# Altium PCB nrf24l01_cell(P40).PcbDoc (part 8 of 11)
Units mm, origin at the board's own origin, x right, y up, seen from the top; angles counter-clockwise.
Board outline 136.2 x 112.2 mm, 2 copper layers (TopLayer, BottomLayer); 520 components, 0 nets, 2804 pads, 1040 vias.
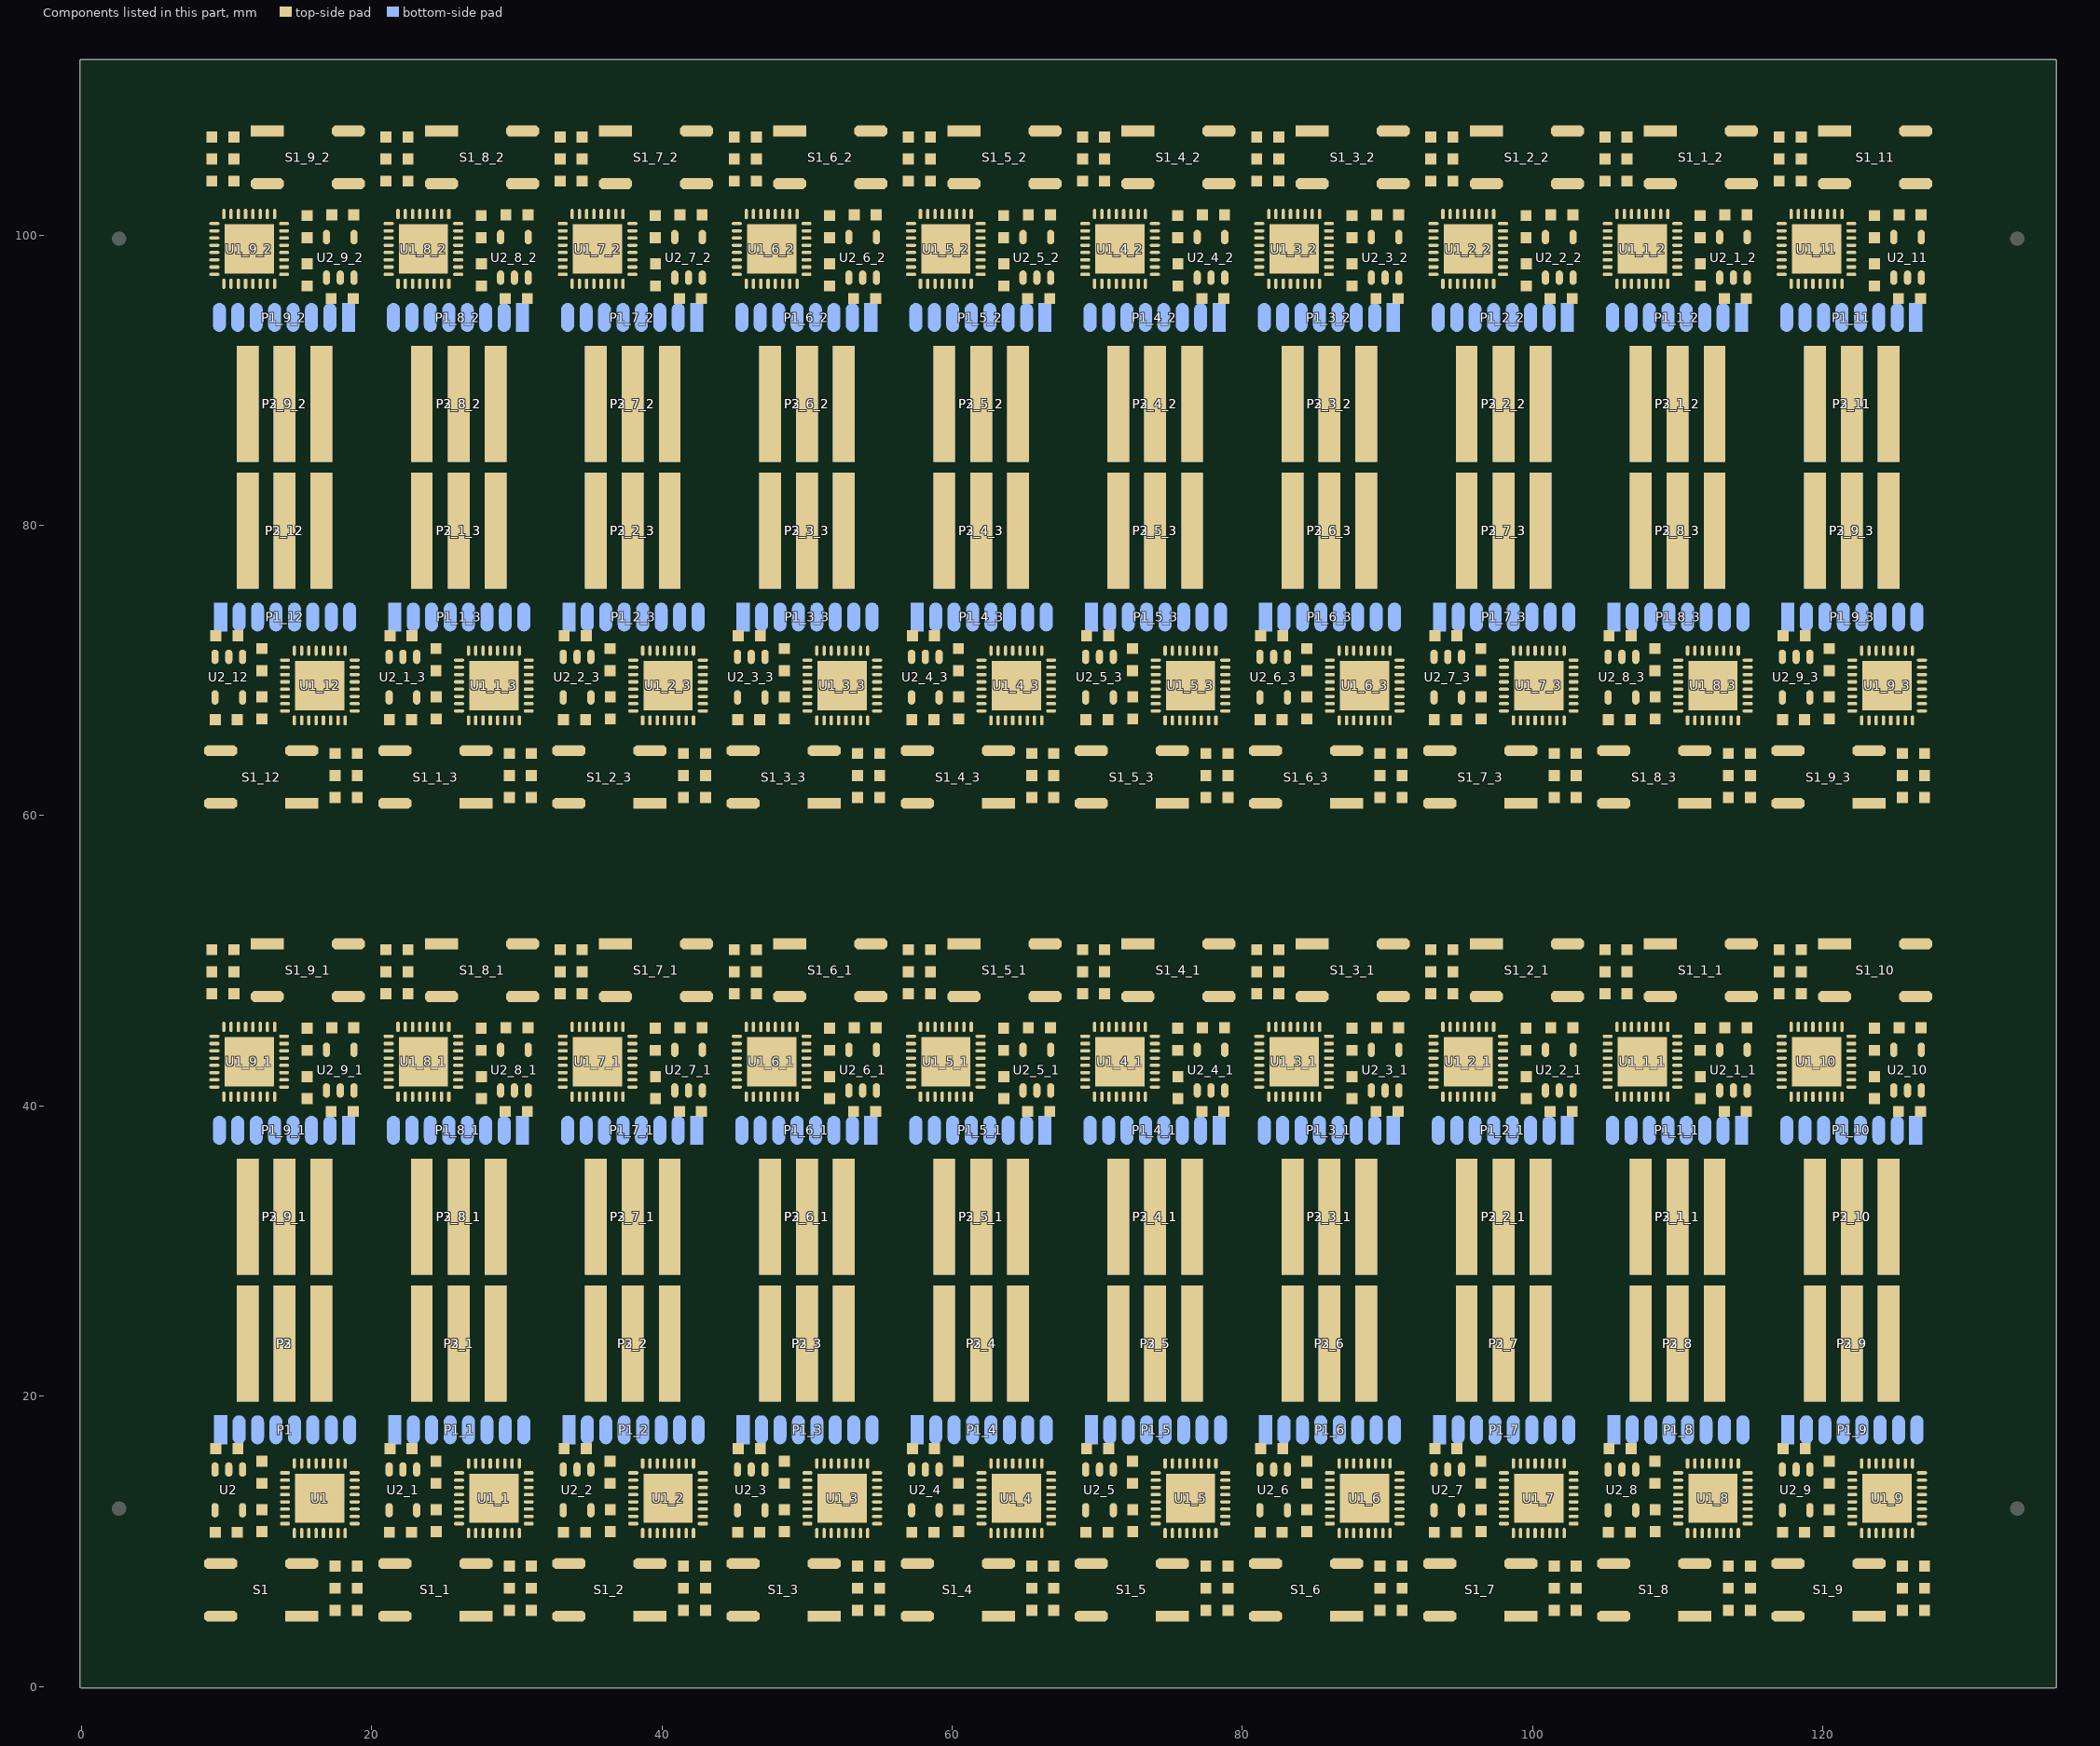
[diagram p8: the components of this part, seen from the top]

## Via types
v1: diameter 0.4, hole 0.2, TopLayer to BottomLayer, tented both sides, 1040 vias

## Nets (pads, with @x,y where several pads share a name; then routed paths per layer and width w, separated by ;. In a path a pad name is that pad's centre, name@x,y a point inside that pad or via, vN(x,y) a via of type N, cw(c..) or ccw(c..) an arc to the next point about the centre after c; other vN are vias at no path point) (continued)
copper on no net: (continued)
  TopLayer w0.254: 109.32,40.64 v1(109.95,40.64) ; 109.32,96.64 v1(109.95,96.64) ; 109.752,50.98 cw(c110.185,50.547) 110.185,51.16 cw(c110.185,51.773) 109.752,51.34 ; 109.752,106.98 cw(c110.185,106.547) 110.185,107.16 cw(c110.185,107.773) 109.752,107.34 ; v1(110.05,15.36) 110.68,15.36 ; v1(110.05,71.36) 110.68,71.36 ; 110.248,4.66 ccw(c109.815,4.227) 109.815,4.84 ccw(c109.815,5.453) 110.248,5.02 ; 110.248,60.66 ccw(c109.815,60.227) 109.815,60.84 ccw(c109.815,61.453) 110.248,61.02 ; 111.16,12.96 112.43,12.96 ; 111.16,68.96 112.43,68.96 ; 111.37,45.524 ccw(c110.937,45.957) 111.55,45.957 ccw(c112.163,45.957) 111.73,45.524 ; 111.37,101.524 ccw(c110.937,101.957) 111.55,101.957 ccw(c112.163,101.957) 111.73,101.524 ; 111.38,41.834 cw(c110.947,41.401) 111.56,41.401 cw(c112.173,41.401) 111.74,41.834 ; 111.38,97.834 cw(c110.947,97.401) 111.56,97.401 cw(c112.173,97.401) 111.74,97.834 ; 111.55,45.344 111.55,46.22 ; 111.55,101.344 111.55,102.22 ; v1(111.56,41.36) 111.56,42.014 112.086,42.54 113.52,42.54 113.98,43 113.98,44.586 114.774,45.38 v1(113.934,46.22) 111.55,46.22 ; 111.56,42.268 ccw(c111.56,42.881) 111.994,42.448 ccw(c112.427,42.014) 111.814,42.014 ; v1(111.56,97.36) 111.56,98.014 112.086,98.54 113.52,98.54 113.98,99 113.98,100.586 114.774,101.38 v1(113.934,102.22) 111.55,102.22 ; 111.56,98.268 ccw(c111.56,98.881) 111.994,98.448 ccw(c112.427,98.014) 111.814,98.014 ; 111.952,4.84 ccw(c112.024,5.565) 112.54,5.05 ; 111.952,60.84 ccw(c112.024,61.565) 112.54,61.05 ; 113.18,10.56 113.18,9.48 113.486,9.174 113.486,8.28 ; 113.18,66.56 113.18,65.48 113.486,65.174 113.486,64.28 ; 113.21,39.62 v1(113.84,40.25) 113.84,41.06 ; 113.21,39.874 ccw(c113.21,40.487) 113.644,40.054 ccw(c114.077,39.62) 113.464,39.62 ; 113.21,95.62 v1(113.84,96.25) 113.84,97.06 ; 113.21,95.874 ccw(c113.21,96.487) 113.644,96.054 ccw(c114.077,95.62) 113.464,95.62 ; 113.306,8.46 ccw(c112.873,8.893) 113.486,8.893 ccw(c114.099,8.893) 113.666,8.46 ; 113.306,64.46 ccw(c112.873,64.893) 113.486,64.893 ccw(c114.099,64.893) 113.666,64.46 ; 113.31,5.06 ccw(c112.877,4.627) 112.877,5.24 ccw(c112.877,5.853) 113.31,5.42 ; 113.31,61.06 ccw(c112.877,60.627) 112.877,61.24 ccw(c112.877,61.853) 113.31,61.42 ; 113.49,5.24 112.73,5.24 112.33,4.84 111.19,4.84 108.93,4.84 108.45,5.32 108.45,9.78 ; 113.49,61.24 112.73,61.24 112.33,60.84 111.19,60.84 108.93,60.84 108.45,61.32 108.45,65.78 ; 113.753,40.723 cw(c113.543,40.513) 113.84,40.513 cw(c114.137,40.513) 113.927,40.723 ; 113.753,96.723 cw(c113.543,96.513) 113.84,96.513 cw(c114.137,96.513) 113.927,96.723 ; 114.774,45.126 ccw(c114.774,44.513) 114.34,44.946 ccw(c113.907,45.38) 114.52,45.38 ccw(c113.907,45.38) 114.34,45.814 ccw(c114.774,46.247) 114.774,45.634 ; 114.774,101.126 ccw(c114.774,100.513) 114.34,100.946 ccw(c113.907,101.38) 114.52,101.38 ccw(c113.907,101.38) 114.34,101.814 ccw(c114.774,102.247) 114.774,101.634 ; 114.834,5.42 ccw(c114.401,5.853) 115.014,5.853 ccw(c115.627,5.853) 115.194,5.42 ; 114.834,6.58 cw(c114.401,6.147) 115.014,6.147 cw(c115.627,6.147) 115.194,6.58 ; 114.834,61.42 ccw(c114.401,61.853) 115.014,61.853 ccw(c115.627,61.853) 115.194,61.42 ; 114.834,62.58 cw(c114.401,62.147) 115.014,62.147 cw(c115.627,62.147) 115.194,62.58 ; 115.014,5.24 115.014,6.76 ; 115.014,61.24 115.014,62.76 ; 116.806,49.42 ccw(c116.373,49.853) 116.986,49.853 ccw(c117.599,49.853) 117.166,49.42 ; 116.806,50.58 cw(c116.373,50.147) 116.986,50.147 cw(c117.599,50.147) 117.166,50.58 ; 116.806,105.42 ccw(c116.373,105.853) 116.986,105.853 ccw(c117.599,105.853) 117.166,105.42 ; 116.806,106.58 cw(c116.373,106.147) 116.986,106.147 cw(c117.599,106.147) 117.166,106.58 ; 116.986,49.24 116.986,50.76 ; 116.986,105.24 116.986,106.76 ; 117.226,10.366 cw(c117.226,9.753) 117.66,10.186 cw(c118.093,10.62) 117.48,10.62 cw(c118.093,10.62) 117.66,11.054 cw(c117.226,11.487) 117.226,10.874 ; 117.226,66.366 cw(c117.226,65.753) 117.66,66.186 cw(c118.093,66.62) 117.48,66.62 cw(c118.093,66.62) 117.66,67.054 cw(c117.226,67.487) 117.226,66.874 ; 118.073,15.277 ccw(c117.863,15.487) 118.16,15.487 ccw(c118.457,15.487) 118.247,15.277 ; 118.073,71.277 ccw(c117.863,71.487) 118.16,71.487 ccw(c118.457,71.487) 118.247,71.277 ; 118.16,14.94 v1(118.16,15.75) 118.79,16.38 ; 118.16,70.94 v1(118.16,71.75) 118.79,72.38 ; 118.334,47.54 cw(c117.901,47.107) 118.514,47.107 cw(c119.127,47.107) 118.694,47.54 ; 118.334,103.54 cw(c117.901,103.107) 118.514,103.107 cw(c119.127,103.107) 118.694,103.54 ; 118.51,50.76 119.27,50.76 119.67,51.16 120.81,51.16 123.07,51.16 123.55,50.68 123.55,46.22 ; 118.51,106.76 119.27,106.76 119.67,107.16 120.81,107.16 123.07,107.16 123.55,106.68 123.55,102.22 ; 118.514,47.72 118.514,46.826 118.82,46.52 118.82,45.44 ; 118.514,103.72 118.514,102.826 118.82,102.52 118.82,101.44 ; 118.536,16.38 cw(c117.923,16.38) 118.356,15.946 cw(c118.79,15.513) 118.79,16.126 ; 118.536,72.38 cw(c117.923,72.38) 118.356,71.946 cw(c118.79,71.513) 118.79,72.126 ; 118.69,50.58 cw(c119.123,50.147) 119.123,50.76 cw(c119.123,51.373) 118.69,50.94 ; 118.69,106.58 cw(c119.123,106.147) 119.123,106.76 cw(c119.123,107.373) 118.69,106.94 ; 119.46,50.95 cw(c119.976,50.435) 120.048,51.16 ; 119.46,106.95 cw(c119.976,106.435) 120.048,107.16 ; 119.57,43.04 120.84,43.04 ; 119.57,99.04 120.84,99.04 ; 120.186,13.986 cw(c119.573,13.986) 120.006,13.552 cw(c120.44,13.119) 120.44,13.732 ; 120.186,69.986 cw(c119.573,69.986) 120.006,69.552 cw(c120.44,69.119) 120.44,69.732 ; 120.26,14.166 ccw(c119.827,14.599) 120.44,14.599 ccw(c121.053,14.599) 120.62,14.166 ; 120.26,70.166 ccw(c119.827,70.599) 120.44,70.599 ccw(c121.053,70.599) 120.62,70.166 ; 120.27,10.476 cw(c119.837,10.043) 120.45,10.043 cw(c121.063,10.043) 120.63,10.476 ; 120.27,66.476 cw(c119.837,66.043) 120.45,66.043 cw(c121.063,66.043) 120.63,66.476 ; v1(120.44,14.64) 120.44,13.986 119.914,13.46 118.48,13.46 118.02,13 118.02,11.414 117.226,10.62 v1(118.066,9.78) 120.45,9.78 ; v1(120.44,70.64) 120.44,69.986 119.914,69.46 118.48,69.46 118.02,69 118.02,67.414 117.226,66.62 v1(118.066,65.78) 120.45,65.78 ; 120.45,10.656 120.45,9.78 ; 120.45,66.656 120.45,65.78 ; 121.32,40.64 v1(121.95,40.64) ; 121.32,96.64 v1(121.95,96.64) ; 121.752,50.98 cw(c122.185,50.547) 122.185,51.16 cw(c122.185,51.773) 121.752,51.34 ; 121.752,106.98 cw(c122.185,106.547) 122.185,107.16 cw(c122.185,107.773) 121.752,107.34 ; v1(122.05,15.36) 122.68,15.36 ; v1(122.05,71.36) 122.68,71.36 ; 122.248,4.66 ccw(c121.815,4.227) 121.815,4.84 ccw(c121.815,5.453) 122.248,5.02 ; 122.248,60.66 ccw(c121.815,60.227) 121.815,60.84 ccw(c121.815,61.453) 122.248,61.02 ; 123.16,12.96 124.43,12.96 ; 123.16,68.96 124.43,68.96 ; 123.37,45.524 ccw(c122.937,45.957) 123.55,45.957 ccw(c124.163,45.957) 123.73,45.524 ; 123.37,101.524 ccw(c122.937,101.957) 123.55,101.957 ccw(c124.163,101.957) 123.73,101.524 ; 123.38,41.834 cw(c122.947,41.401) 123.56,41.401 cw(c124.173,41.401) 123.74,41.834 ; 123.38,97.834 cw(c122.947,97.401) 123.56,97.401 cw(c124.173,97.401) 123.74,97.834 ; 123.55,45.344 123.55,46.22 ; 123.55,101.344 123.55,102.22 ; v1(123.56,41.36) 123.56,42.014 124.086,42.54 125.52,42.54 125.98,43 125.98,44.586 126.774,45.38 v1(125.934,46.22) 123.55,46.22 ; 123.56,42.268 ccw(c123.56,42.881) 123.994,42.448 ccw(c124.427,42.014) 123.814,42.014 ; v1(123.56,97.36) 123.56,98.014 124.086,98.54 125.52,98.54 125.98,99 125.98,100.586 126.774,101.38 v1(125.934,102.22) 123.55,102.22 ; 123.56,98.268 ccw(c123.56,98.881) 123.994,98.448 ccw(c124.427,98.014) 123.814,98.014 ; 123.952,4.84 ccw(c124.024,5.565) 124.54,5.05 ; 123.952,60.84 ccw(c124.024,61.565) 124.54,61.05 ; 125.18,10.56 125.18,9.48 125.486,9.174 125.486,8.28 ; 125.18,66.56 125.18,65.48 125.486,65.174 125.486,64.28 ; 125.21,39.62 v1(125.84,40.25) 125.84,41.06 ; 125.21,39.874 ccw(c125.21,40.487) 125.644,40.054 ccw(c126.077,39.62) 125.464,39.62 ; 125.21,95.62 v1(125.84,96.25) 125.84,97.06 ; 125.21,95.874 ccw(c125.21,96.487) 125.644,96.054 ccw(c126.077,95.62) 125.464,95.62 ; 125.306,8.46 ccw(c124.873,8.893) 125.486,8.893 ccw(c126.099,8.893) 125.666,8.46 ; 125.306,64.46 ccw(c124.873,64.893) 125.486,64.893 ccw(c126.099,64.893) 125.666,64.46 ; 125.31,5.06 ccw(c124.877,4.627) 124.877,5.24 ccw(c124.877,5.853) 125.31,5.42 ; 125.31,61.06 ccw(c124.877,60.627) 124.877,61.24 ccw(c124.877,61.853) 125.31,61.42 ; 125.49,5.24 124.73,5.24 124.33,4.84 123.19,4.84 120.93,4.84 120.45,5.32 120.45,9.78 ; 125.49,61.24 124.73,61.24 124.33,60.84 123.19,60.84 120.93,60.84 120.45,61.32 120.45,65.78 ; 125.753,40.723 cw(c125.543,40.513) 125.84,40.513 cw(c126.137,40.513) 125.927,40.723 ; 125.753,96.723 cw(c125.543,96.513) 125.84,96.513 cw(c126.137,96.513) 125.927,96.723 ; 126.774,45.126 ccw(c126.774,44.513) 126.34,44.946 ccw(c125.907,45.38) 126.52,45.38 ccw(c125.907,45.38) 126.34,45.814 ccw(c126.774,46.247) 126.774,45.634 ; 126.774,101.126 ccw(c126.774,100.513) 126.34,100.946 ccw(c125.907,101.38) 126.52,101.38 ccw(c125.907,101.38) 126.34,101.814 ccw(c126.774,102.247) 126.774,101.634 ; 126.834,5.42 ccw(c126.401,5.853) 127.014,5.853 ccw(c127.627,5.853) 127.194,5.42 ; 126.834,6.58 cw(c126.401,6.147) 127.014,6.147 cw(c127.627,6.147) 127.194,6.58 ; 126.834,61.42 ccw(c126.401,61.853) 127.014,61.853 ccw(c127.627,61.853) 127.194,61.42 ; 126.834,62.58 cw(c126.401,62.147) 127.014,62.147 cw(c127.627,62.147) 127.194,62.58 ; 127.014,5.24 127.014,6.76 ; 127.014,61.24 127.014,62.76